# Altium PCB RF_Controller_wv.PcbDoc
Units mil, origin at the board's own origin, x right, y up, seen from the top; angles counter-clockwise.
Board outline 6377.95 x 2913.39 mil, 2 copper layers (Top Layer, Bottom Layer); 84 components, 59 nets, 326 pads, 342 vias.
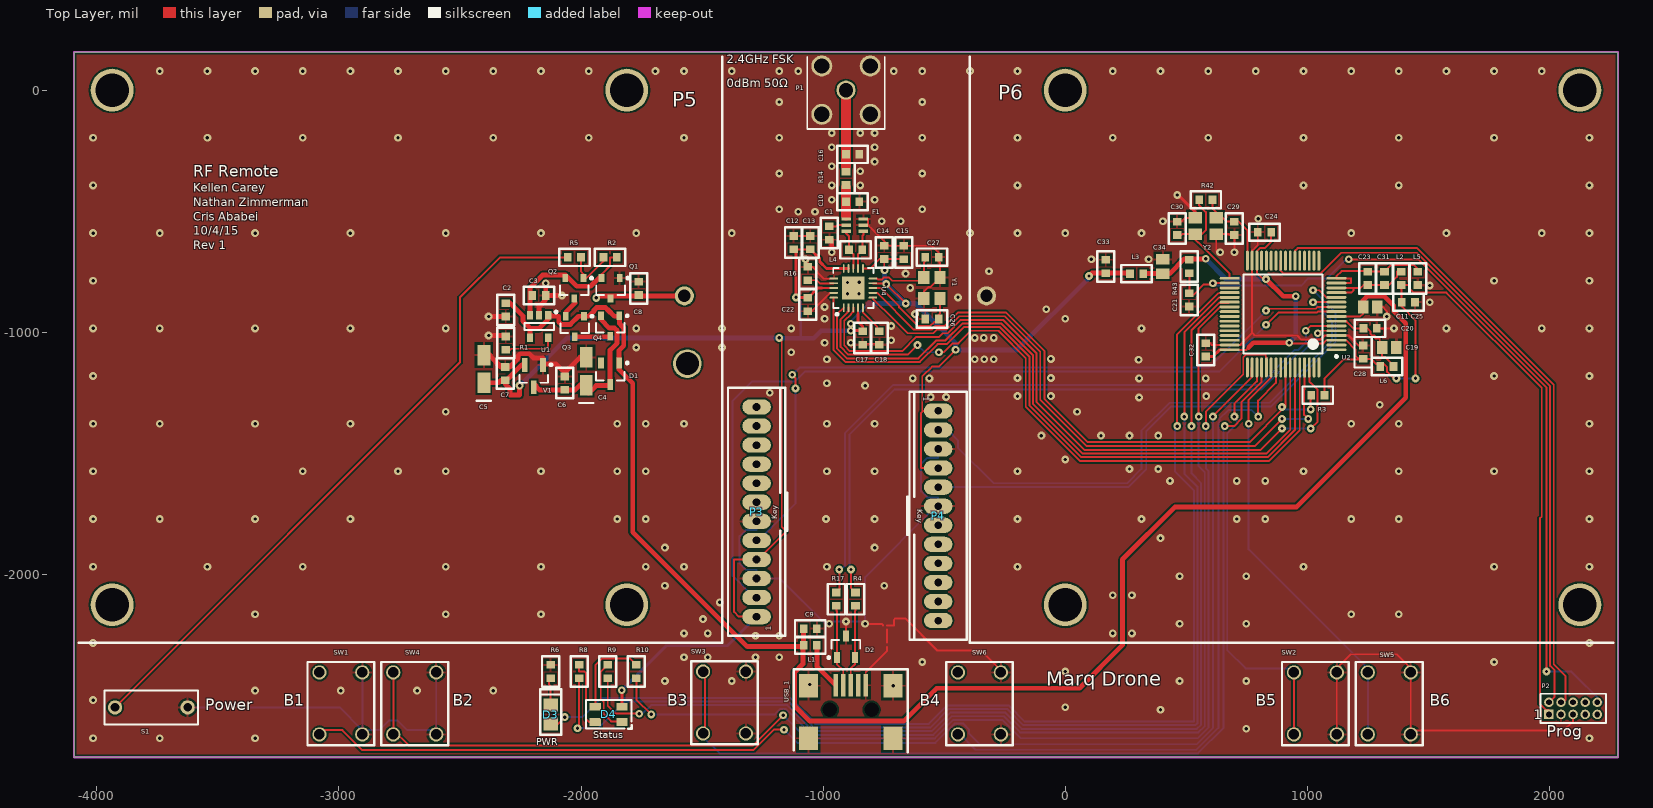
[diagram p0: Top Layer view]
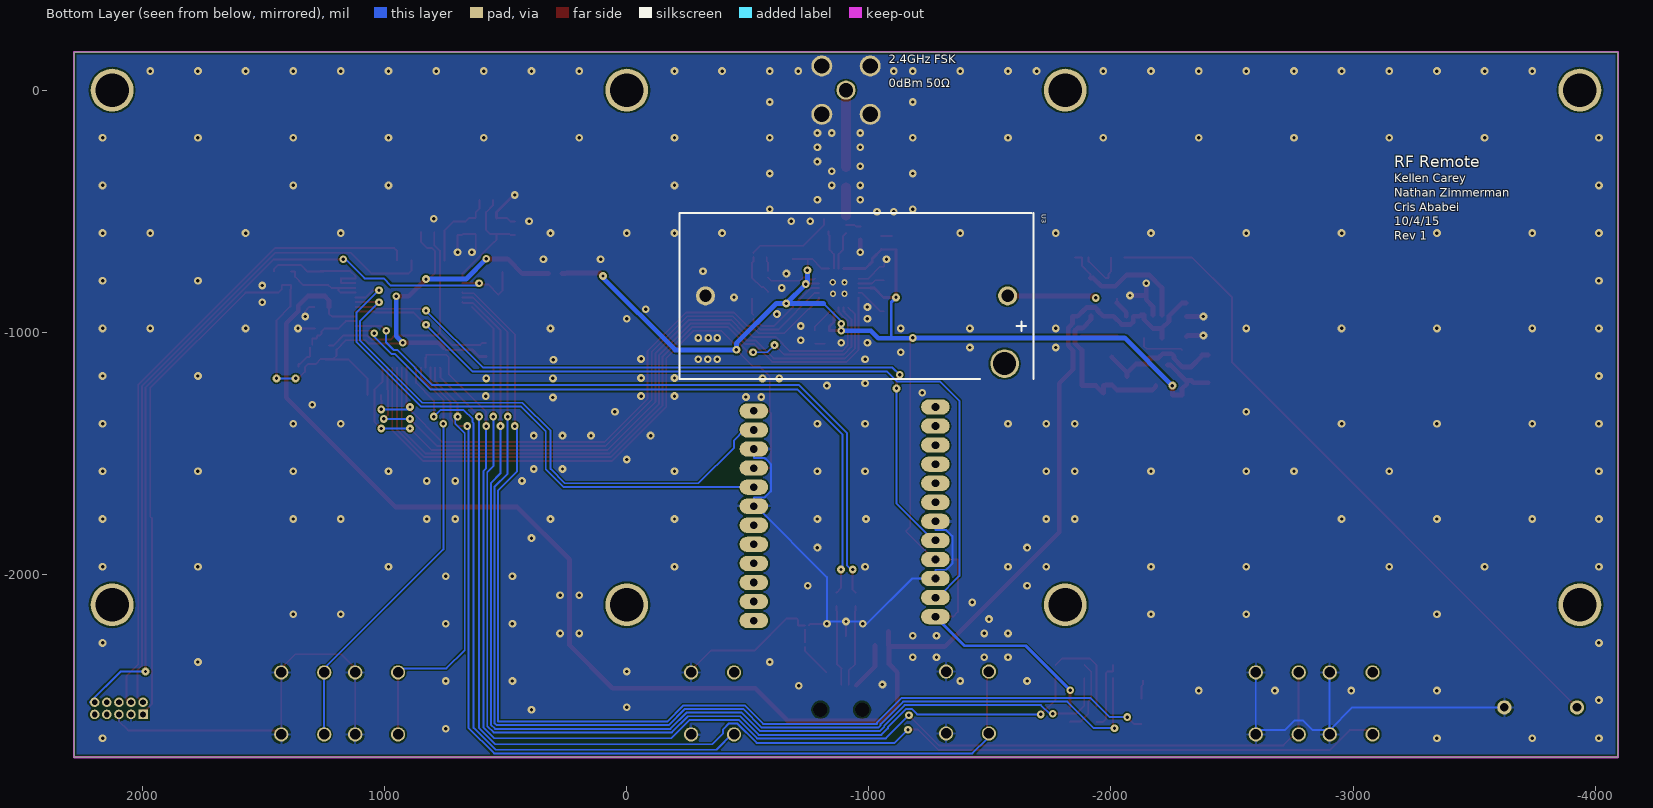
[diagram p1: Bottom Layer view, seen from below]
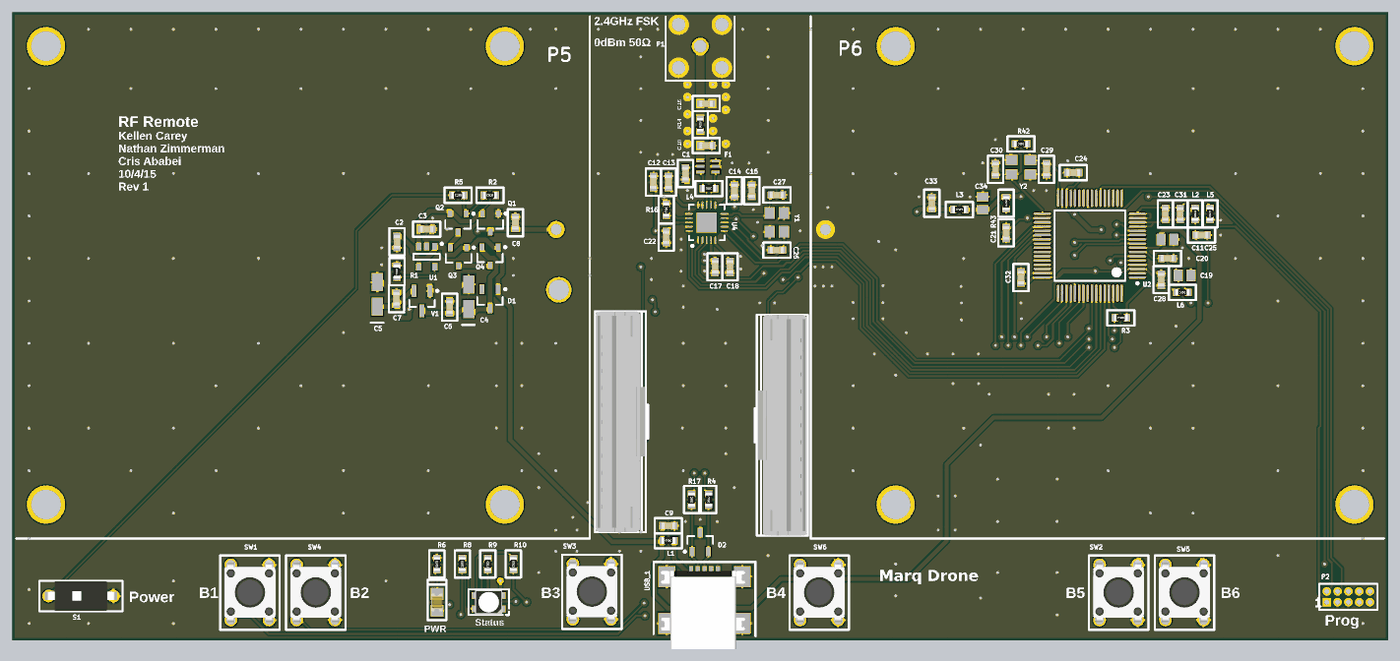
[diagram p2: 3D render of the assembled board from above, using the file's embedded part models]

## Layer stack, top to bottom
Top Solder: solder mask 0.4, Solder Resist, Dk 3.5
Top Layer: signal copper 1.4
Dielectric1: dielectric 12.6, FR-4, Dk 4.8
Bottom Layer: signal copper 1.4
Bottom Solder: solder mask 0.4, Solder Resist, Dk 3.5

## Board outline
-4094.49,-2755.91 2283.46,-2755.91 2283.46,157.48 -4094.49,157.48

## Design rules (kind name [scope] priority, off if disabled: settings)
AssemblyTestPointUsage [All] p1 off:
AssemblyTestpoint [All] p1 off: testpointundercomponent=TRUE minsize=40 maxsize=100 preferedsize=60 minholesize=0 maxholesize=40 preferedholesize=32 testpointgrid=1 usegrid=TRUE gridtolerance=0.01 allowsidetop=TRUE allowsidebottom=TRUE
Clearance [All] p1: gap=7
DiffPairsRouting [All] p1: maxlimit=200 minlimit=10 mostfreqgap=10 toplayer_minwidth=8 toplayer_maxwidth=15 toplayer_prefwidth=15 bottomlayer_minwidth=8 bottomlayer_maxwidth=15 bottomlayer_prefwidth=15 maxuncoupledlength=1000
FabricationTestPointUsage [All] p1 off: valid=0 allowmultiple=FALSE
FabricationTestpoint [All] p1 off: side=3 testpointundercomponent=TRUE minsize=40 maxsize=100 preferedsize=60 minholesize=0 maxholesize=40 preferedholesize=32 testpointgrid=1 allowsidetop=TRUE allowsidebottom=TRUE usegrid=TRUE gridtolerance=0.01
HoleSize [All] p1: absolutevalues=TRUE maxlimit=250 minlimit=1 maxpercent=80.000 minpercent=20.000
HoleToHoleClearance [All] p1: gap=12 allowstackedmicrovias=FALSE
MinimumSolderMaskSliver [All] p1: minsoldermaskwidth=6
PasteMaskExpansion [All] p1: expansion=-2
PlaneConnect PlaneConnect_1 [InComponent('P1') OR InComponent('C16')] p1: planeconnectstyle=Direct reliefexpansion=20 reliefentries=4 reliefconductorwidth=20 reliefairgap=10
PlaneConnect [All] p2: planeconnectstyle=Relief reliefexpansion=20 reliefentries=4 reliefconductorwidth=20 reliefairgap=10
PolygonConnect PolygonConnect_1 [InComponent('P1') OR InComponent('C16') OR InComponent('U3')] p1: connectstyle=Direct reliefconductorwidth=10 reliefentries=4 polygonreliefangle="90 Angle" airgapwidth=10
PolygonConnect PolygonConnect_2 [(InPadClass('All Pads'))] p2: connectstyle=Relief reliefconductorwidth=10 reliefentries=4 polygonreliefangle="90 Angle" airgapwidth=10
PolygonConnect [All] p3: connectstyle=Direct reliefconductorwidth=10 reliefentries=4 polygonreliefangle="90 Angle" airgapwidth=10
RoutingVias [All] p1: holewidth=14 width=32 viastyle="Through Hole" minholewidth=14 minwidth=32 maxholewidth=14 maxwidth=32
SMDEntry [All] p1: side=TRUE corner=FALSE anyangle=TRUE
SilkToSilkClearance [All] p1: silktosilkclearance=4
SilkToSolderMaskClearance SilkscreenOverComponentPads [IsPad] p1: minsilkscreentomaskgap=4 clearancetoexposedcopper=TRUE
SolderMaskExpansion SolderMaskExpansion_1 [InComponent('U2')] p1: expansion=0
SolderMaskExpansion [All] p2: expansion=4
Width Width_3 [InNet('GND')] p1: maxlimit=20 minlimit=6 preferedwidth=12
Width Width_2 [InNet('3.3V')] p2: maxlimit=20 minlimit=6 preferedwidth=12
Width Width_1 [InNet('5V')] p3: maxlimit=20 minlimit=6 preferedwidth=12
Width [All] p4: maxlimit=78.74 minlimit=8 preferedwidth=8
18 further rules are at their usual default settings.

## Classes and differential pairs
differential pair U: +U_P -U_N
differential pair USB_MCU: +USB_MCU_P -USB_MCU_N
differential pair RF: +RF_P -RF_N

## Components (designator, comment, footprint, x,y, rotation, side; value= is the part's Value field where it differs from the comment)
C1 "0805" 1608[0603]C -974.41,-590.55 r270 top
C2 "0805" 1608[0603]C -2311.02,-907.48 r270 top
C3 "0805" 1608[0603]C -2173.23,-848.43 r0 top
C4 "Cap Pol1" 1206_C -1978.35,-1161.42 r90 top
C5 "Cap Pol1" 1206_C -2401.57,-1151.57 r90 top
C6 "0805" 1608[0603]C -2066.93,-1210.63 r90 top
C7 "0805" 1608[0603]C -2312.99,-1171.26 r90 top
C8 "0805" 1608[0603]C -1761.81,-818.9 r90 top
C9 "0805" 1608[0603]C -1053.15,-2224.41 r0 top
C10 "0805" 1608[0603]C -877.95,-460.63 r180 top
C11 "0805" C0805 1259.84,-895.67 r0 top
C12 "0805" 1608[0603]C -1122.05,-629.92 r90 top
C13 "0805" 1608[0603]C -1053.15,-629.92 r90 top
C14 "0805" 1608[0603]C -747.42,-669.96 r90 top
C15 "0805" 1608[0603]C -666.56,-670.47 r90 top
C16 "0805" 1608[0603]C -877.95,-265.75 r180 top
C17 "0805" 1608[0603]C -836.61,-1023.62 r270 top
C18 "0805" 1608[0603]C -767.72,-1023.62 r270 top
C19 "0805" C0805 1338.58,-1062.99 r0 top
C20 "0805" 1608[0603]C 1259.84,-984.25 r0 top
C21 "0805" 1608[0603]C 511.81,-866.14 r90 top
C22 "0805" 1608[0603]C -1062.99,-885.83 r270 top
C23 "0805" 1608[0603]C 1250,-777.56 r270 top
C24 "0805" 1608[0603]C 822.83,-586.61 r0 top
C25 "0805" 1608[0603]C 1417.32,-875.98 r180 top
C26 "0805" 1608[0603]C -550.57,-945.55 r0 top
C27 "0805" 1608[0603]C -550.57,-689.65 r180 top
C28 "0805" 1608[0603]C 1230.32,-1082.68 r270 top
C29 "0805" 1608[0603]C 698.82,-570.87 r90 top
C30 "0805" 1608[0603]C 462.6,-570.87 r270 top
C31 "0805" 1608[0603]C 1318.9,-777.56 r270 top
C32 "0805" 1608[0603]C 580.71,-1072.83 r90 top
C33 "0805" 1608[0603]C 167.32,-728.35 r90 top
C34 "0805" C0805 403.54,-728.35 r90 top
D1 "Bat45C" SOT-23B_N -1879.92,-1171.26 r270 top
D2 "Bat54A" SOT-23B_N -905.71,-2299.8 r90 top
D3 "LG R971-KN-1" 6-0805_M_LED_LIB -2125.28,-2579.33 r90 top
D4 "SMT RGB LED" CLV1A-FKB_RGB_3D -1830.71,-2598.43 r180 top
F1 "BALUN_2_4_GHZ" Balun -904.9,-532.17 r90 top
L1 "FB" 1608[0603]R -1053.15,-2293.31 r0 top
L2 "FB" 1608[0603]R 1387.8,-777.56 r270 top
L3 "10nH" 1608[0603]R 295.28,-757.87 r180 top
L4 "10nH" 1608[0603]R -865.53,-660.12 r0 top
L5 "FB" 1608[0603]R 1456.69,-777.56 r270 top
L6 "10nH" 1608[0603]R 1328.74,-1141.73 r180 top
P1 "SMB" SMA -905.51,0 r0 top
P2 "Header 5X2" MHDR2X5 1998.03,-2578.74 r0 top
P3 "1-1735446-2" 1-1735446-2 -1275,-2175 r90 top
P4 "1-1735446-2" 1-1735446-2 -525,-1325 r270 top
P5 "Header 4" Joystick_Mechanical_Footprint_2 -1811.02,-2125.98 r180 top locked
P6 "Header 4" Joystick_Mechanical_Footprint_2 0,0 r0 top locked
Q1 "k" SOT-23_L -1877.95,-818.9 r270 top
Q2 "k" SOT-23_L -2027.56,-818.9 r270 top
Q3 "k" SOT-23_L -2025.59,-976.38 r270 top
Q4 "k" SOT-23_L -1879.92,-974.41 r270 top
R1 "Res1" 1608[0603]R -2311.02,-1045.28 r90 top
R2 "Res1" 1608[0603]R -1879.92,-690.94 r0 top
R3 "Res1" 1608[0603]R 1043.31,-1259.84 r0 top
R4 "Res1" 1608[0603]R -866.34,-2102.95 r90 top
R5 "Res1" 1608[0603]R -2027.56,-690.94 r0 top
R6 "Res1" 1608[0603]R -2125.98,-2401.57 r90 top
R8 "Res1" 1608[0603]R -2007.87,-2401.57 r90 top
R9 "Res1" 1608[0603]R -1889.76,-2401.57 r90 top
R10 "Res1" 1608[0603]R -1771.65,-2401.57 r90 top
R14 "Res1" 1608[0603]R -905.51,-364.17 r270 top
R16 "Res1" 1608[0603]R -1062.99,-757.87 r90 top
R17 "Res1" 1608[0603]R -945.08,-2102.95 r90 top
R42 "Res1" 1608[0603]R 580.71,-452.76 r180 top
R43 "Res1" 1608[0603]R 511.81,-728.35 r90 top
S1 "SW-SPST" 418117270901_ft_prt_3d -3925,-2550 r0 top
SW1 "1825910-7" Tact_ButtonVV -2992.13,-2529.53 r90 top
SW2 "1825910-7" Tact_ButtonVV 1033.46,-2529.53 r90 top
SW3 "1825910-7" Tact_ButtonVV -1407.48,-2525.68 r90 top
SW4 "1825910-7" Tact_ButtonVV -2687.01,-2529.53 r90 top
SW5 "1825910-7" Tact_ButtonVV 1338.58,-2529.53 r90 top
SW6 "1825910-7" Tact_ButtonVV -354.33,-2529.53 r90 top
U1 "MCP73812" SOT23-5AL -2173.23,-976.38 r270 top
U2 "MKL25Z64VLH4" TSQFP50P1200X1200-64M 900,-925 r180 top
U3 "CR2" BH-CR2-PC_FTPRT -325,-850 r180 bottom locked
U4 "CC2500_2_4_ghz" QFN50P400X400-20VM -875.38,-817.6 r90 top
USB_1 "USB-M2xFxx" USB_Mini_B_SMT -885.83,-2411.42 r0 top
V1 "MCP1702 3.3V Reg" SOT-23B_M -2194.88,-1181.1 r270 top
Y1 "26MHz" 7M-12.000MAAJ-T_FP -550.57,-817.6 r90 top
Y2 "12MHz" 7M-12.000MAAJ-T_FP 580.71,-561.02 r180 top

## Footprints (in the part's own frame and the unit in brackets; to place one, negate y for a bottom-side part, rotate by r counter-clockwise, add the part's x,y. Pads: shape width x height; smd on the part's side, far side on the other; paste and mask are expansions set on the pad)
1-1735446-2 [mm]
  oval 1.6x3 hole 0.8: 1(0,0) 2(2,0) 3(4,0) 4(6,0) 5(8,0) 6(10,0) 7(12,0) 8(14,0) 9(16,0) 10(18,0) 11(20,0) 12(22,0)
  silkscreen extent -2,-3.25 24,3, body extent -2,-2.9 24,2.9, height 6.1
6-0805_M_LED_LIB [mm] "Chip Resistor, Body 2.0x1.2mm, IPC Low Density"
  rect 1.4x1.5 smd: 1(-1,0) 2(1,0)
  silkscreen extent -2.1,-1.1 2.65,1.1, body extent -1.05,-0.67 1.05,0.68, height 0.9
7M-12.000MAAJ-T_FP [mm] "12 MHz Micro Crystal"
  rect 1.4x1.2 smd: 1(-1.1,-0.85) 2(1.1,-0.85) 3(1.1,0.85) 4(-1.1,0.85)
1206_C [mm] "1206_Cap"
  rect 2.15x1.35 smd: 1(-1.45,0) 2(1.45,0)
  silkscreen extent -3.33,-0.71 -3.33,0.76
1608[0603]C [mm] "Chip Capacitor, Body 1.6x0.8mm, IPC High Density"
  rect 0.8x0.9 smd: 1(-0.7,0) 2(0.7,0)
  silkscreen extent -1.6,-0.9 1.6,0.9, body extent -0.8,-0.4 0.8,0.4, height 0.78
1608[0603]R [mm] "Chip Capacitor, Body 1.6x0.8mm, IPC High Density"
  rect 0.8x0.9 smd: 1(-0.7,0) 2(0.7,0)
  silkscreen extent -1.6,-0.9 1.6,0.9, body extent -0.8,-0.4 0.8,0.4, height 0.44
418117270901_ft_prt_3d [mm]
  round 1.5 hole 0.9: 1(0,0) 2(7.62,0)
  silkscreen extent -1.1,-1.8 8.7,1.8, body extent -1.44,-1.74 9.06,1.74, height 3.29
Balun [mm]
  rect 0.35x1 smd mask+0.152: 1(0,0) 2(-0.65,0) 3(-1.3,0) 4(-1.3,-1.8) 5(-0.65,-1.8) 6(0,-1.8)
BH-CR2-PC_FTPRT [mm]
  round 2 hole 1.3: 1(0,0) 2(31.7,0)
  round 3 hole 2.4: ""(31.39,-7.11)
  silkscreen extent -2.72,-8.7 34.42,8.7
C0805 [mm] "Chip Capacitor, Body 2.0x1.3mm, IPC High Density"
  rect 1.1x1.4 smd: 1(-0.75,0) 2(0.75,0)
  body extent -1.1,-0.72 1.1,0.72, height 1.4
CLV1A-FKB_RGB_3D [mm]
  rect 1.2x0.8 smd: 1(0,0.3) 2(0,-1.3) 3(2.8,-1.3) 4(2.8,0.3)
  silkscreen extent -1,-2 3.8,1, body extent -0.35,-1.91 3.15,0.89, height 1.9
Joystick_Mechanical_Footprint_2 [mm] "Layout for mechanically connecting joystick to PCB"
  round 4.5 hole 3.5: 0(0,0) 0(0,-54) 0(54,-54) 1(54,0)
  silkscreen extent -10,-57.5 57.5,4
MHDR2X5 [mm] "Connector; Header; 5x2 Position"
  rect 1x1 hole 0.6 mask+0: 1(0,0)
  round 1 hole 0.6 mask+0: 2(0,1.27) 3(1.27,0) 4(1.27,1.27) 5(2.54,0) 6(2.54,1.27) 7(3.81,0) 8(3.81,1.27) 9(5.08,0) 10(5.08,1.27)
  silkscreen extent -0.9,-0.9 5.98,2.17
QFN50P400X400-20VM [mm] "QFN, 20-Leads, Body 4x4mm, Pitch 0.5mm, IPC Low Density"
  oval 0.9x0.2 smd mask+0.051: 1(-2.05,1) 2(-2.05,0.5) 3(-2.05,0) 4(-2.05,-0.5) 5(-2.05,-1) 11(2.05,-1) 12(2.05,-0.5) 13(2.05,0) 14(2.05,0.5) 15(2.05,1)
  oval 0.2x0.9 smd mask+0.051: 6(-1,-2.05) 7(-0.5,-2.05) 8(0,-2.05) 9(0.5,-2.05) 10(1,-2.05) 16(1,2.05) 17(0.5,2.05) 18(0,2.05) 19(-0.5,2.05) 20(-1,2.05)
  rect 2.4x2.4 smd mask+0.051: 21(0,0)
  silkscreen extent -2.87,-2.1 2.1,2.1, body extent -2.07,-2.07 2.07,2.07, height 1
SMA [mm]
  round 2 hole 1.5: 1(0,0)
  round 2.2 hole 1.6: 2(-2.54,-2.54) 2(-2.54,2.54) 2(2.54,-2.54) 2(2.54,2.54)
  silkscreen extent -4.06,-4.06 4.06,3.5
SOT23-5AL [mm] "SOT23, 5-Leads, Body 2.9x1.6mm, Pitch 0.95mm, Lead Span 2.8mm, IPC High Density"
  rect 0.9x0.65 smd mask+0.051: 1(-1.2,0.95) 2(-1.2,0) 3(-1.2,-0.95) 4(1.2,-0.95) 5(1.2,0.95)
  silkscreen extent -1.65,-1.55 0.35,1.9, body extent -0.9,-1.55 0.9,1.55, height 1.45
SOT-23_L [mm] "SOT23, 3-Leads, Body 2.9x1.3mm, Pitch 0.95mm, Lead Span 2.5mm, IPC High Density"
  rect 0.85x0.6 smd: 1(-1.075,0.95) 2(-1.075,-0.95) 3(1.075,0)
  silkscreen extent -1.2,-1.5 0.7,1.93, body extent -0.7,-1.5 0.7,1.5, height 1.1
SOT-23B_M [mm] "SOT23, 3-Leads, Body 2.9x1.3mm, Pitch 0.95mm, Lead Span 2.4mm, IPC Low Density"
  rect 1.45x0.6 smd: 1(-1.175,0.95) 2(-1.175,-0.95) 3(1.175,0)
  silkscreen extent -1.3,-1.5 0.7,1.93, body extent -0.7,-1.5 0.7,1.5, height 1.14
SOT-23B_N [mm] "SOT23, 3-Leads, Body 2.9x1.3mm, Pitch 0.95mm, Lead Span 2.4mm, IPC Medium Density"
  rect 1.15x0.6 smd: 1(-1.125,0.95) 2(-1.125,-0.95) 3(1.125,0)
  silkscreen extent -1.25,-1.5 0.7,1.93, body extent -0.7,-1.5 0.7,1.5, height 1.14
Tact_ButtonVV [mm]
  round 1.5 hole 1.1: 1(-3.35,-2.25) 2(3.15,-2.25) 3(-3.35,2.25) 4(3.15,2.25)
  silkscreen extent -4.5,-3.5 4.25,3.5, body extent -4.21,-3 4.01,3, height 9.5
TSQFP50P1200X1200-64M [mm] "Thin QFP, 64-Leads, Body 10x10mm, Pitch 0.5mm, IPC Low Density"
  oval 2.1x0.3 smd: 1(-5.6,3.75) 2(-5.6,3.25) 3(-5.6,2.75) 4(-5.6,2.25) 5(-5.6,1.75) 6(-5.6,1.25) 7(-5.6,0.75) 8(-5.6,0.25) 9(-5.6,-0.25) 10(-5.6,-0.75) 11(-5.6,-1.25) 12(-5.6,-1.75) 13(-5.6,-2.25) 14(-5.6,-2.75) 15(-5.6,-3.25) 16(-5.6,-3.75) 33(5.6,-3.75) 34(5.6,-3.25) 35(5.6,-2.75) 36(5.6,-2.25) 37(5.6,-1.75) 38(5.6,-1.25) 39(5.6,-0.75) 40(5.6,-0.25) 41(5.6,0.25) 42(5.6,0.75) 43(5.6,1.25) 44(5.6,1.75) 45(5.6,2.25) 46(5.6,2.75) 47(5.6,3.25) 48(5.6,3.75)
  oval 0.3x2.1 smd: 17(-3.75,-5.6) 18(-3.25,-5.6) 19(-2.75,-5.6) 20(-2.25,-5.6) 21(-1.75,-5.6) 22(-1.25,-5.6) 23(-0.75,-5.6) 24(-0.25,-5.6) 25(0.25,-5.6) 26(0.75,-5.6) 27(1.25,-5.6) 28(1.75,-5.6) 29(2.25,-5.6) 30(2.75,-5.6) 31(3.25,-5.6) 32(3.75,-5.6) 49(3.75,5.6) 50(3.25,5.6) 51(2.75,5.6) 52(2.25,5.6) 53(1.75,5.6) 54(1.25,5.6) 55(0.75,5.6) 56(0.25,5.6) 57(-0.25,5.6) 58(-0.75,5.6) 59(-1.25,5.6) 60(-1.75,5.6) 61(-2.25,5.6) 62(-2.75,5.6) 63(-3.25,5.6) 64(-3.75,5.6)
  silkscreen extent -5.72,-4.15 4.15,4.57, body extent -5,-5 5,5, height 1.6
USB_Mini_B_SMT [mil] "USB Mini B connector SMD"
  rect 20x94 smd mask+0: 1(-62,-47) 2(-31,-47) 3(0,-47) 4(31,-47) 5(62,-47)
  rect 79x98 smd: 6(-175,-49) 7(-175,-266) 8(175,-266) 9(175,-49)
  round 0 hole 60 unplated mask+36: ""(-86,-148) ""(86,-148)
  silkscreen extent -236,-325 236,20, body extent -202,-385 188,-21, height 159

## Part data
C1 C2 C3 C6 C7 C8 C9 C10 C11 C12 C13 C14 C15 C16 C17 C18 C19 C20 C21 C22 C23 C24 C25 C26 C27 C28 C29 C30 C31 C32 C33 C34: library part "Cap Semi", "Capacitor (Semiconductor SIM Model)"
C4 C5: "Polarized Capacitor (Radial)"
D2: library part Bat45C, "Bat45C"
D3: library part LED3
D4: library part RGB_LED_SMT
F1: "2450BM15B0003"
L1 L2 L3 L4 L5 L6: library part Inductor, "Inductor"
P1: "SMB Straight Connector"
P2: "Header, 5-Pin, Dual row"
P3 P4: library part TE_CONN, "TE Connectivity AMP Connector"
P5 P6: "Header, 4-Pin"
Q1 Q2 Q3 Q4: library part PMOS-2, "P-Channel Power MOSFET"
R1 R2 R3 R4 R5 R6 R8 R9 R10 R14 R16 R17 R42 R43: "Resistor"
S1: "Single-Pole, Single-Throw Switch"
SW1 SW2 SW3 SW4 SW5 SW6: library part D6x-XX
U2: "MKL25Z64VLH4 MCU"
USB_1: "USB Mini-B for USB-M2xFxx"
V1: library part MCP1700, "MCP1700 3.3V REG"
Y1 Y2: library part 12MHz_Crystal, "12MHz Micro Crystal"

## Via types
v1: diameter 32, hole 14, Top Layer to Bottom Layer, tented both sides, 323 vias
v2: diameter 32, hole 14, Top Layer to Bottom Layer, 13 vias
v3: diameter 25.98, hole 12.99, Top Layer to Bottom Layer, tented both sides, 3 vias
v4: diameter 32, hole 14, Top Layer to Bottom Layer, tented bottom, 2 vias
v5: diameter 25.98, hole 15, Top Layer to Bottom Layer, tented both sides, 1 vias

## Nets (pads, with @x,y where several pads share a name; then routed paths per layer and width w, separated by ;. In a path a pad name is that pad's centre, name@x,y a point inside that pad or via, vN(x,y) a via of type N, cw(c..) or ccw(c..) an arc to the next point about the centre after c; other vN are vias at no path point)
3.3V: C5.1 C7.1 C12.1 C13.1 C14.1 C15.1 C17.1 C22.1 C33.1 D4.2 L3.2 P3.1 P3.4 P4.1 P4.4 U4.4 U4.9 U4.11 U4.14 U4.15 U4.18 V1.2 | length 7676.7
  Top Layer w6: P3.4 -1267.5,-1938.78 -1151.57,-1822.86 -1171.26,-1803.17 -1171.26,-1033.46 v1(-1181.1,-1023.62)
  Top Layer w8: P3.1 -1348.62,-2175 -1368.11,-2155.51 -1368.11,-1938.98 -1367.91,-1938.78 P3.4 ; C12.1@-1111.6,-658.15 C13.1@-1052.48,-658.15 ; -1004.61,-817.6 U4.18 ; -855.69,-925.2 U4.4@-855.69,-916.02 ; U4.11 -804.51,-736.89 -765.14,-697.52 C14.1 ; U4.9 -742.23,-797.91 v1(-738.86,-801.29) v1(-658.82,-881.33) ; v1(-746.06,-744.09) -747.42,-742.73 C14.1 ; C15.1@-684.27,-698.03 -684.79,-697.52 C14.1 ; P4.4 -594.29,-1561.22 -595.06,-1560.46 -595.06,-1333.24 -590.55,-1328.74 ; P4.1 -586.81,-1325 -590.55,-1328.74 ; v1(-452.75,-1072.83) -521.65,-1141.73 -549.99,-1141.73 -590.55,-1182.29 -590.55,-1328.74
  Top Layer w12: v2(-1831.69,-2479.33) -1831.69,-2481.3 -1830.71,-2482.28 D4.2 ; C12.1@-1111.6,-658.15 -1111.6,-855.69 v1(-1112.2,-856.3) -1061.02,-856.3 -1022.32,-817.6 -1004.61,-817.6 ; C13.1 -1052.48,-658.15 -1013.78,-696.85 -1013.78,-708.66 -985.55,-736.89 U4.15 U4.14 ; v1(-885.83,-994.09) v1(-885.83,-964.56) ; v1@-874.33,-992.44 -836.4,-992.44 -836.4,-976.69 -855.69,-957.4 -855.69,-925.2
  Top Layer w20: C5.1 -2340.55,-1208.66 -2330.71,-1198.82 C7.1 C7.1@-2312.99,-1203.74 ; v1(-2253.94,-1220.47) -2253.94,-1259.84 -2293.31,-1259.84 -2293.31,-1234.25 -2312.99,-1214.57 C7.1@-2312.99,-1203.74 ; V1.2 -2244.09,-1134.84 C7.1@-2312.99,-1203.74 ; v1(98.43,-767.72) 110.24,-755.9 C33.1 250,-755.9 251.97,-757.87 L3.2
  Bottom Layer w8: v1(-885.83,-964.56) -885.83,-954.72 -812.43,-881.33 ; v1(-746.06,-744.09) -746.06,-794.09 v1(-738.86,-801.29)
  Bottom Layer w12: v2(-1831.69,-2479.33) -1647.64,-2295.28 -1395.28,-2295.28 P3.1 ; v1(-1112.2,-856.3) -1092.52,-875.98 -1092.52,-1025.13
  Bottom Layer w20: v1(-2253.94,-1220.47) -2057.09,-1023.62 v1@-1182.66,-1023.62 ; v1@-1181.1,-1025.13 -1092.52,-1025.13 -1039.48,-1025.13 -1008.45,-994.09 v1(-885.83,-994.09) v1(-885.83,-964.56) ; -812.43,-881.33 v1(-658.82,-881.33) ; v1@-746.06,-794.09 v1(-746.06,-744.09) ; v1(-738.86,-801.29) v1(-658.82,-881.33) ; v1(98.43,-767.72) 98.43,-775.02 -199.39,-1072.83 v1(-452.75,-1072.83) -452.75,-1045.85 -617.28,-881.33 v1(-658.82,-881.33)
3.3VB: C19.1 C20.1 L6.1 U2.7 | length 355.2
  Top Layer w8: U2.7 1161.81,-954.53 1161.81,-957.31 1162.91,-957.31 1189.85,-984.25 1202.21,-984.25 C20.1 1248.03,-984.25 1260.65,-996.87 1260.65,-1006.53 1267.1,-1012.97 1276.75,-1012.97 1279.53,-1015.75 1279.53,-1023.62 1281.5,-1025.59 1299.21,-1025.59 C19.1@1299.21,-1053.15 ; C19.1 1309.06,-1100.39 1311.83,-1103.17 1321.49,-1103.17 1350.2,-1131.89 1356.3,-1131.89 L6.1
3.3VC: C24.2 C25.2 C28.2 C32.1 C34.1 L2.2 L3.1 L6.2 P2.1 R3.2 R43.2 U2.3 U2.30 U2.48 | length 4991.3
  Top Layer w8: U2.48 748.23,-1072.64 757.87,-1062.99 ; v1(829.53,-780.71) 818.47,-780.71 791.73,-753.97 U2.30 791.73,-664.72 804.26,-652.19 824.19,-652.19 850.39,-625.98 C24.2 ; v1(925.2,-1043.31) 927.82,-1045.94 1066.47,-1045.94 1079.13,-1033.27 U2.3 1160.28,-1033.27 1198.82,-1071.8 1198.82,-1096.46 1212.6,-1110.24 C28.2 C28.2@1248.03,-1110.24 ; R3.2 1070.87,-1192.91 1151.57,-1112.2 1246.06,-1112.2 C28.2@1248.03,-1110.24 ; v1(1368.11,-1190.94) 1356.49,-1190.94 1329.55,-1164.01 1329.55,-1144.51 1316.93,-1131.89 1285.43,-1131.89 1263.78,-1110.24 C28.2@1248.03,-1110.24 ; v1(1446.85,-1190.94) 1446.85,-950.79 1389.76,-893.7 C25.2 1389.76,-822.83 1387.8,-820.87 L2.2 1425.2,-805.12 1425.2,-822.64 1439.17,-836.61 1574.8,-836.61 1968.5,-1230.31 1968.5,-1761.81 1961.19,-1769.13 1961.19,-2535.29 1985.32,-2559.43 1998.03,-2559.43 P2.1
  Top Layer w12: C32.1 610.43,-1100.39 638.19,-1072.64 U2.48
  Top Layer w20: L3.1 375.98,-757.87 C34.1 431.1,-757.87 491.93,-697.05 v1(580.51,-697.05) ; 757.87,-1062.99 777.56,-1043.31 v1(925.2,-1043.31) ; v1(829.53,-780.71) 900.39,-851.57 v1(952.49,-851.57)
  Bottom Layer w8: v1(1368.11,-1190.94) v1(1446.85,-1190.94)
  Bottom Layer w20: v1(580.51,-697.05) 664.18,-780.71 v1(829.53,-780.71) ; v1(925.2,-1043.31) 952.49,-1016.01 v1(952.49,-851.57)
5V: C2.1 C9.1 C11.1 D1.1 L1.1 Q3.1 Q4.1 U1.1 U1.4 U2.8 | length 6848
  Top Layer w8: U2.8 1218.7,-934.84 1230.32,-923.23 C11.1
  Top Layer w20: C2.1 -2293.31,-879.92 -2240.43,-932.8 -2240.43,-953.89 -2210.63,-983.69 -2210.63,-990.16 ; U1.4 -2210.63,-990.16 ; D1.1@-1842.52,-1104.33 -1842.52,-1154.82 -1786.71,-1210.63 -1786.71,-1825.5 -1313.38,-2298.82 -1083.17,-2298.82 -1083.17,-2370.22 -1117.33,-2404.38 -1117.33,-2544.09 -1055,-2606.42 -667.44,-2606.42 -531.5,-2470.47 59.06,-2470.47 236.22,-2293.31 236.22,-1938.98 452.76,-1722.44 954.72,-1722.44 1406.76,-1270.4 1406.76,-963.85 1357.01,-914.1 1357.01,-890.06 1318.07,-851.11 1247.32,-851.11 1230.32,-868.11 C11.1 ; -1842.52,-1097.44 -1842.52,-1074.8 -1823.39,-1055.68 -1823.39,-982.49 -1831.09,-974.79 ; -1830.71,-974.41 -1831.09,-974.79 ; L1.1 -1080.71,-2242.13 C9.1@-1080.71,-2236.22 ; -2210.63,-990.16 -2204.72,-984.25 -2173.23,-984.25 -2135.83,-946.85 U1.1 -2123.03,-929.13 -2118.11,-934.06 -2091.8,-934.06 -2091.8,-957.83 -2081.84,-967.79 -2044.14,-967.79 -2010.41,-934.06 Q3.1 -1967.94,-934.06 -1946.13,-912.25 -1946.13,-908.31 -1936.18,-898.35 -1898.47,-898.35 -1888.51,-908.31 -1862.77,-934.06 -1840.55,-934.06 -1840.55,-965.33 -1831.09,-974.79
BUTTON_1: SW1.3 U2.50 | length 5456.3
  Top Layer w8: SW1.3@-3080.51,-2643.7 -2986.22,-2643.7 -2903.54,-2726.38 -1287.84,-2726.38 -1203.2,-2641.73 v1(-1161.42,-2641.73) ; v1(610.24,-1348.43) 610.24,-1346.94 769.27,-1187.91 769.27,-1148.25 U2.50
  Bottom Layer w8: v1(-1161.42,-2641.73) -1106.3,-2696.85 -535.86,-2696.85 -455.37,-2616.36 -421.8,-2616.36 -398.05,-2640.1 -398.05,-2657.48 -353.59,-2701.94 543.89,-2701.94 610.24,-2635.59 v1(610.24,-1348.43) v1@610.24,-1338.58
BUTTON_2: SW2.3 SW2.4 U2.51 | length 1788.9
  Top Layer w8: v1(698.82,-1348.43) 698.82,-1296.35 791.73,-1203.44 U2.51 ; SW2.3@944.49,-2644.81 SW2.4@944.49,-2388.9
  Bottom Layer w8: v1(698.82,-1348.43) 708.66,-1358.27 708.66,-1377.95 669.29,-1417.32 669.29,-2312.99 745.2,-2388.9 SW2.4@944.49,-2388.9
BUTTON_3: SW3.3 SW3.4 U2.52 | length 4102
  Top Layer w8: SW3.3@-1488.58,-2631.89 SW3.4@-1488.58,-2375.98 ; v1(659.45,-1387.8) 697.63,-1387.8 729.12,-1356.3 729.12,-1287.26 811.42,-1204.97 U2.52
  Bottom Layer w8: SW3.3@-1488.58,-2631.89 -1488.58,-2679.3 -1427.98,-2739.91 548.35,-2739.91 654.29,-2633.96 654.29,-1392.95 v1(659.45,-1387.8) ; v1@664.24,-1387.8 v1@664.24,-1376.88
BUTTON_4: SW4.3 SW4.4 U2.53 | length 5581.7
  Top Layer w8: SW4.4@-2775.39,-2387.79 -2775.39,-2643.7 -2712.4,-2706.69 -1289.37,-2706.69 v1(-1165.35,-2582.68) ; v1(580.71,-1387.8) 580.71,-1328.74 735.46,-1173.99 735.46,-1103.04 745.36,-1093.13 828.2,-1093.13 828.32,-1093.25 828.32,-1104.13 831.1,-1104.13 U2.53
  Bottom Layer w8: v1(-1165.35,-2582.68) -1069.92,-2678.11 -538.33,-2678.11 -461.58,-2601.36 -259.63,-2601.36 -183.83,-2677.17 547.45,-2677.17 591.5,-2633.12 591.5,-1572.69 580.71,-1561.9 v1@580.71,-1377.96
BUTTON_5: SW5.3 SW5.4 U2.54 | length 1741.7
  Top Layer w8: v1(757.87,-1377.95) 757.87,-1279.72 850.79,-1186.81 U2.54
  Bottom Layer w8: v1(757.87,-1377.95) 757.87,-1896.69 1250.08,-2388.9 SW5.3@1250.08,-2644.81
BUTTON_6: SW6.3 U2.55 | length 2834.7
  Top Layer w8: v1(797.24,-1348.43) 797.24,-1282.87 870.47,-1209.64 U2.55
  Bottom Layer w8: SW6.3@-438.58,-2656.89 -370.57,-2724.91 542.14,-2724.91 632.45,-2634.59 632.45,-1376.61 637.24,-1371.82 637.24,-1358.27 674.08,-1321.43 770.24,-1321.43 v1(797.24,-1348.43)
CMP_OUT: U2.1
CSN: R3.1 U2.57 U4.7 | length 2530
  Top Layer w8: U4.7 -776.95,-837.28 -624.97,-989.27 -551.61,-989.27 -536.61,-974.27 -498.44,-974.27 -443.27,-919.09 -244.52,-919.09 -86.06,-1077.56 -86.06,-1274.96 93.15,-1454.17 761.59,-1454.17 898.82,-1316.93 v1@903.54,-1316.93 ; v1@909.84,-1309.06 U2.57 ; v1(1013.78,-1318.9) 1013.78,-1279.53 1015.75,-1277.56 R3.1
  Bottom Layer w8: v1(895.67,-1309.06) 905.51,-1318.9 v1(1013.78,-1318.9)
EXTAL+: C29.2 R42.1 U2.32 Y2.1 | length 356.4
  Top Layer w8: R42.1 608.27,-488.19 624.02,-503.94 Y2.1 651.57,-527.56 667.32,-543.31 C29.2 716.54,-543.31 752.36,-579.13 U2.32
EXTAL-: C30.2 R42.2 U2.33 Y2.3 | length 506.8
  Top Layer w8: C30.2 480.31,-598.43 484.25,-594.49 Y2.3 ; R42.2 553.15,-476.57 580.71,-504.13 580.71,-578.74 564.96,-594.49 Y2.3 ; U2.33 679.53,-757.88 551.38,-629.73 549.02,-629.73 537.4,-618.11 Y2.3
EXTRA_LED: R9.1 U2.38 | length 4571.1
  Top Layer w8: R9.1 -1889.76,-2543.12 -1857.09,-2575.79 v1(-1759.84,-2575.79) ; v1(521.65,-1387.8) 521.65,-992.32 635.41,-878.57 676.75,-878.57 U2.38
  Bottom Layer w8: v1(-1759.84,-2575.79) -1751.37,-2575.79 -1748.42,-2578.74 -1710.36,-2540.68 -1147.96,-2540.68 -1063.46,-2625.17 -1063.46,-2630.54 -1045.89,-2648.11 -550.76,-2648.11 -474.01,-2571.36 -246.66,-2571.36 -179.75,-2638.27 543.92,-2638.27 561.5,-2620.69 561.5,-1622.96 521.65,-1583.12 v1@521.65,-1377.95
GDO0: U2.61 U4.6 | length 2494.8
  Top Layer w8: U4.6 -794.67,-860.91 -708.16,-947.41 -707.32,-947.41 -650.46,-1004.27 -545.4,-1004.27 -530.4,-989.27 -492.23,-989.27 -437.05,-934.09 -250.74,-934.09 -103.11,-1081.72 -103.11,-1279.12 86.93,-1469.17 784.77,-1469.17 v1(895.67,-1358.27) ; U2.61 988.58,-1235.83 986.78,-1237.63 986.78,-1341.11 v1(1003.94,-1358.27)
  Bottom Layer w8: v1(895.67,-1358.27) v1(1003.94,-1358.27)
GDO2: U2.62 U4.3 | length 2818.6
  Top Layer w8: U4.3 -875.38,-916.02 -876.65,-916.02 -884.81,-924.18 -884.81,-925.37 -912.83,-953.38 -912.83,-1054.49 -889.39,-1077.93 -673.2,-1077.93 -614.54,-1019.27 -520.7,-1019.27 -505.7,-1004.27 -486.01,-1004.27 -430.84,-949.09 -256.95,-949.09 -118.11,-1087.94 -118.11,-1289.37 78.74,-1486.22 807.09,-1486.22 v1(895.67,-1397.64) ; U2.62 1008.27,-1205.12 1013.78,-1210.63 1015.56,-1210.63 1042.5,-1237.57 1042.5,-1368.92 v1(1013.78,-1397.64)
  Bottom Layer w8: v1(895.67,-1397.64) v1(1013.78,-1397.64)
GND: C1.2 C2.2 C3.2 C4.2 C5.2 C6.2 C7.2 C8.2 C9.2 C10.1 C11.2 C12.2 C13.2 C14.2 C15.2 C16.1 C17.2 C18.2 C19.2 C20.2 C21.1 C22.2 C24.1 C25.1 C26.1 C27.1 C28.1 C29.1 C30.1 C32.2 C33.2 C34.2 D2.3 F1.5 F1.6 L5.2 P1.2 P2.3 P2.5 P3.3 P3.6 P4.3 P4.6 Q1.1 R1.2 R6.2 R16.2 S1.2 SW1.1 SW1.2 SW2.1 SW2.2 SW3.1 SW3.2 SW4.1 SW4.2 SW5.1 SW5.2 SW6.1 SW6.2 U1.2 U2.4 U2.31 U2.47 U3.1 U4.16 U4.19 U4.21 USB_1.5 USB_1.6 USB_1.7 USB_1.8 USB_1.9 V1.1 Y1.2 Y1.4 Y2.2 Y2.4 | length 9707.1
  Top Layer w6: v1(-1072.83,-698.82) -1072.83,-704.73 -1062.99,-714.57 R16.2 -1045.28,-730.31 -997.36,-778.23 U4.16 ; C22.2 -1045.99,-913.39 -969.89,-837.28 U4.19
  Top Layer w8: -1095.85,-603.03 C13.2@-1050.57,-603.03 ; USB_1.6 v4(-1055.83,-2455.42) ; D2.3 -905.51,-2255.31 v1(-905.51,-2194.88) ; v1(-826.77,-2204.72) -758.66,-2204.72 -752.17,-2211.22 ; -824.02,-2405.13 -736.42,-2317.52 -736.42,-2299.8 ; -818.68,-1047.56 C18.2@-776.4,-1047.56 ; F1.6@-814.35,-532.17 -814.35,-557.76 -729.2,-642.91 C15.2 -552.03,-642.91 C27.1@-523.02,-671.93 ; P1.2@-805.51,-139.46 P1.2@-805.51,-100 ; -736.42,-2282.09 -736.42,-2226.97 ; -736.42,-2211.22 -708.05,-2211.22 -708.05,-2188.95 -701.6,-2182.5 -660.02,-2182.5 -527.56,-2314.96 -347.44,-2314.96 SW6.2@-254.59,-2407.81 ; Y1.4@-584.04,-833.35 -563.54,-812.85 -555.86,-812.85 -517.11,-774.1 -517.11,-713.27 -523.02,-707.36 C27.1 ; SW6.1@-261.42,-2656.89 SW6.1@-254.59,-2650.06 ; C30.1 480.31,-543.31 496.06,-527.56 Y2.2 ; v1@462.6,-442.91 v1(462.6,-433.07) ; C32.2 598.43,-1045.27 606.1,-1052.95 U2.47 720.87,-1052.95 772.05,-1001.77 ; v1(639.76,-669.29) 639.76,-679.13 624.02,-663.39 Y2.4 677.17,-594.49 681.1,-598.42 C29.1 v1(698.82,-669.29) ; C24.1 795.28,-639.96 772.05,-663.19 U2.31 772.05,-1001.77 ; SW2.1@1121.66,-2644.81 1121.66,-2388.9 1180.24,-2330.31 1368.66,-2330.31 1427.25,-2388.9 1427.25,-2644.81 2059.92,-2644.81 2098.03,-2606.69 P2.5 ; C28.1 1212.6,-1055.12 1171.06,-1013.58 U2.4 1071.84,-1013.58 1054.49,-1030.94 975.71,-1030.94 958.36,-1013.58 783.86,-1013.58 772.05,-1001.77 ; C20.2 1303.15,-984.25 v1(1358.27,-984.25) ; C11.2 1311.02,-895.67 1328.74,-913.38 v1(1328.74,-935.04)
  Top Layer w12: v1@462.6,-442.91 476.38,-442.91 537.4,-503.94 Y2.2
  Top Layer w20: C5.2 -2375,-1094.49 -2375,-1099.41 -2330.71,-1143.7 C7.2 -2295.28,-1143.7 -2261.09,-1109.52 -2261.09,-1099.26 -2251.14,-1089.3 -2213.43,-1089.3 -2196.43,-1106.3 -2157.48,-1106.3 -2157.48,-1129.92 -2155.51,-1131.89 -2102.36,-1131.89 C6.2@-2066.93,-1167.32 ; v1(-2381.89,-1013.78) -2314.96,-1013.78 R1.2 ; v1(-2381.89,-935.04) C2.2 ; U1.2 -2173.23,-893.7 -2145.67,-866.14 C3.2 ; v1(-2145.67,-797.24) C3.2 ; v1(-2078.74,-848.43) C3.2 ; C6.2 C6.2@-2066.93,-1167.32 ; C6.2@-2066.93,-1181.1 C6.2@-2066.93,-1167.32 ; C4.2@-2002.95,-1102.36 -2004.92,-1104.33 -2004.92,-1105.31 C6.2@-2066.93,-1167.32 ; v1(-964.57,-669.29) C1.2@-964.57,-618.11
  Bottom Layer w8: S1.2 -2997.05,-2550 SW1.1@-2903.35,-2643.7 ; SW1.2@-2903.35,-2387.79 SW1.1@-2903.35,-2643.7 ; SW4.2@-2598.23,-2387.79 -2598.23,-2643.7 -2718.08,-2643.7 -2758.61,-2603.17 -2792.18,-2603.17 -2832.71,-2643.7 SW1.1@-2903.35,-2643.7 ; P3.6 -1275,-1817.54 -1320.16,-1817.54 -1345.06,-1842.44 -1345.06,-1956.38 -1320.16,-1981.28 -1275,-1981.28 P3.3 -1178.15,-2017.52 -990.94,-2204.72 v1(-974.41,-2204.72) -964.57,-2194.88 v1(-905.51,-2194.88) -836.61,-2194.88 v1(-826.77,-2204.72) -826.77,-2011.56 P4.6@-533.92,-1718.7 ; v1(-1072.83,-698.82) v1@-1062.99,-688.98 ; v4(-1055.83,-2455.42) -1055.83,-2457.95 v4@-1053.15,-2460.63 ; P4.6 -525,-1682.46 -570.16,-1682.46 -595.06,-1657.56 -595.06,-1543.62 -570.16,-1518.72 -525,-1518.72 P4.3 ; U3.1@-360.04,-854.33 U3.1@-340.35,-834.65 ; v1(1328.74,-935.04) v1@1338.58,-925.2 ; SW5.2@1427.16,-2388.82 SW5.2@1427.25,-2388.9
  other v1: -4015.75,-2677.17 -3740.16,-2677.17 -3346.46,-2677.17 2165.35,-2677.17 748.03,-2637.8 393.7,-2559.06 0,-2549.21 -4015.75,-2519.69 -3346.46,-2480.31 -2992.13,-2480.31 -2677.17,-2480.31 -2362.2,-2480.31 -1653.54,-2440.94 -1377.95,-2440.94 472.44,-2440.94 748.03,-2440.94 0,-2401.57 -590.55,-2362.2 1771.65,-2362.2 -1574.8,-2342.52 -1476.38,-2342.52 -1279.53,-2342.52 -1181.1,-2342.52 -4015.75,-2283.46 2165.35,-2283.46 -1279.53,-2253.94 -1181.1,-2253.94 -1574.8,-2244.09 -1476.38,-2244.09 196.85,-2244.09 275.59,-2244.09 472.44,-2204.72 748.03,-2204.72 -1496.06,-2185.04 -3346.46,-2165.35 -2559.06,-2165.35 -2165.35,-2165.35 1181.1,-2165.35 1377.95,-2165.35 -1427.17,-2116.14 196.85,-2086.61 275.59,-2086.61 -1653.54,-2047.24 -748.03,-2047.24 472.44,-2007.87 748.03,-2007.87 -4015.75,-1968.5 -3543.31,-1968.5 -3149.61,-1968.5 -2559.06,-1968.5 -2165.35,-1968.5 -1732.28,-1968.5 -1574.8,-1968.5 -984.25,-1968.5 -196.85,-1968.5 984.25,-1968.5 1771.65,-1968.5 2165.35,-1968.5 -1653.54,-1889.76 -787.4,-1889.76 393.7,-1850.39 -4015.75,-1771.65 -3740.16,-1771.65 -3346.46,-1771.65 -2952.76,-1771.65 -1850.39,-1771.65 -1732.28,-1771.65 -988.19,-1771.65 -787.4,-1771.65 -196.85,-1771.65 314.96,-1771.65 708.66,-1771.65 826.77,-1771.65 1181.1,-1771.65 1377.95,-1771.65 2165.35,-1771.65 433.07,-1614.17 708.66,-1614.17 826.77,-1614.17 -4015.75,-1574.8 -3149.61,-1574.8 -2755.91,-1574.8 -2559.06,-1574.8 -2165.35,-1574.8 -1850.39,-1574.8 -1732.28,-1574.8 -984.25,-1574.8 -787.4,-1574.8 -196.85,-1574.8 984.25,-1574.8 1377.95,-1574.8 1771.65,-1574.8 2165.35,-1574.8 265.75,-1564.96 383.86,-1564.96 0,-1525.59 -98.43,-1427.17 147.64,-1427.17 265.75,-1427.17 383.86,-1427.17 -4015.75,-1377.95 -3740.16,-1377.95 -3346.46,-1377.95 -2952.76,-1377.95 -1850.39,-1377.95 -1732.28,-1377.95 -1574.8,-1377.95 -984.25,-1377.95 -787.4,-1377.95 1181.1,-1377.95 1377.95,-1377.95 2165.35,-1377.95 -2559.06,-1328.74 49.21,-1328.74 1299.21,-1299.21 305.12,-1269.69 -555.12,-1267.72 -492.13,-1267.72 -196.85,-1263.78 -59.06,-1263.78 582.68,-1263.78 -1220.47,-1250 -826.77,-1220.47 -984.25,-1210.63 -629.92,-1190.94 -561.02,-1190.94 305.12,-1190.95 580.71,-1190.94 -196.85,-1188.98 -59.06,-1188.98 -4015.75,-1181.1 1771.65,-1181.1 2165.35,-1181.1 303.15,-1114.17 -984.25,-1112.2 -374.02,-1112.2 -334.65,-1112.2 -295.28,-1112.2 -59.06,-1110.24 -1131.89,-1082.68 -1771.65,-1062.99 -1417.32,-1062.99 -994.09,-1043.31 -885.83,-1043.31 -718.5,-1033.46 -374.02,-1023.62 -336.52,-1023.62 -295.28,-1023.62 -4015.75,-984.25 -3740.16,-984.25 -3346.46,-984.25 -2952.76,-984.25 -2559.06,-984.25 -1771.65,-984.25 -1417.32,-984.25 -1131.89,-984.25 314.96,-984.25 1574.8,-984.25 1968.5,-984.25 2165.35,-984.25 -718.5,-974.41 -994.09,-944.88 0,-944.88 -620.08,-925.2 -78.74,-905.51 -994.09,-895.67 1505.91,-875.98 -442.91,-856.3 -639.76,-816.93 1505.91,-807.09 -4015.75,-787.4 1771.65,-787.4 2165.35,-787.4 -659.45,-757.87 -314.96,-748.03 108.27,-698.82 344.49,-698.82 -4015.75,-590.55 -3740.16,-590.55 -3346.46,-590.55 -2952.76,-590.55 -2559.06,-590.55 -2165.35,-590.55 -1771.65,-590.55 -1377.95,-590.55 -393.7,-590.55 -196.85,-590.55 0,-590.55 314.96,-590.55 1181.1,-590.55 1574.8,-590.55 1968.5,-590.55 2165.35,-590.55 -757.87,-541.34 -679.13,-541.34 403.54,-541.34 797.24,-531.5 -1102.36,-501.97 -1033.46,-501.97 -1181.1,-492.13 -590.55,-492.13 -4015.75,-393.7 -196.85,-393.7 984.25,-393.7 1377.95,-393.7 2165.35,-393.7 -1181.1,-344.49 -590.55,-344.49 -4015.75,-196.85 -3543.31,-196.85 -3149.61,-196.85 -2755.91,-196.85 -2362.2,-196.85 -1968.5,-196.85 -1574.8,-196.85 -1181.1,-196.85 -590.55,-196.85 -196.85,-196.85 196.85,-196.85 590.55,-196.85 984.25,-196.85 1377.95,-196.85 1771.65,-196.85 2165.35,-196.85 -1181.1,-49.21 -590.55,-49.21 -3740.16,78.74 -3543.31,78.74 -3346.46,78.74 -3149.61,78.74 -2952.76,78.74 -2755.91,78.74 -2559.06,78.74 -2362.2,78.74 -2165.35,78.74 -1968.5,78.74 -1692.91,78.74 -1574.8,78.74 -1377.95,78.74 -1181.1,78.74 -1102.36,78.74 -708.66,78.74 -590.55,78.74 -393.7,78.74 -196.85,78.74 196.85,78.74 393.7,78.74 590.55,78.74 787.4,78.74 984.25,78.74 1181.1,78.74 1377.95,78.74 1574.8,78.74 1771.65,78.74 1968.5,78.74
  other v2: -964.57,-452.76 -787.4,-452.76 -964.57,-393.7 -846.46,-393.7 -846.46,-334.65 -964.57,-314.96 -787.4,-295.28 -964.57,-236.22 -787.4,-236.22 -964.57,-177.17 -846.46,-177.17 -787.4,-177.17
  other v3: -899,-841.22 -851.75,-841.22 -899,-793.98
  other v4: -710.83,-2460.42
  other v5: -851,-793.98
KL25_SWD_CLK: P2.4 U2.22 | length 2694.9
  Top Layer w8: U2.22 949.21,-663.19 960.21,-652.19 1454.02,-652.19 2018.19,-1216.36 2018.19,-2372.18 2067.35,-2421.34 2067.35,-2519.01 2057.61,-2528.74 P2.4
MISO: U2.60 U4.2 | length 2805.7
  Top Layer w8: U4.2 -895.06,-913.22 -896.53,-914.69 -899.81,-914.69 -899.81,-919.15 -927.83,-947.17 -927.83,-1060.7 -895.6,-1092.93 -650.02,-1092.93 v1(-610.24,-1053.15) ; v1(-521.65,-1082.68) -500.78,-1082.68 -463.94,-1045.83 -441.57,-1045.83 -389.83,-994.09 -275.59,-994.09 -163.11,-1106.57 -163.11,-1308.01 60.1,-1531.22 842.7,-1531.22 968.9,-1405.02 U2.60
  Bottom Layer w8: v1(-610.24,-1053.15) -580.71,-1082.68 v1(-521.65,-1082.68)
MOSI: U2.59 U4.20 | length 2849.3
  Top Layer w8: U4.20 -957.83,-858.71 -957.83,-1073.13 -908.03,-1122.93 -600.42,-1122.93 -526.76,-1049.27 -488.59,-1049.27 -418.41,-979.09 -269.38,-979.09 -148.11,-1100.36 -148.11,-1301.8 66.31,-1516.22 836.48,-1516.22 949.21,-1403.49 U2.59
NetC1_1: C1.1 F1.2 | length 61.8
  Top Layer w8: C1.1@-964.57,-562.99 -946.85,-562.99 -941.61,-557.76 F1.2
NetC3_1: C3.1 Q1.2 Q2.2 R2.2 U1.3 | length 591
  Top Layer w8: Q1.2 -1915.35,-759.84 -1879.92,-724.41 -1879.92,-690.94 R2.2
  Top Layer w20: U1.3 -2210.63,-815.54 -2159.34,-764.24 -2063.51,-764.24 -2017.45,-810.31 -1960.9,-810.31 -1927.17,-776.57 Q1.2
NetC8_1: C8.1 Q1.3 U3.2 | length 367.4
  Top Layer w20: v1(-1937.01,-858.25) -1928.76,-850 U3.2
NetC10_2: C10.2 F1.1 R14.2 | length 118.1
  Top Layer w39.37: -905.51,-519.68 R14.2@-905.51,-401.57
NetC18_1: C18.1 U4.5 | length 101.1
  Top Layer w8: U4.5@-836.01,-916.02 -836.01,-917.09 -776.4,-976.69 C18.1@-776.4,-992.44
NetC23_1: C23.1 C31.1 L5.1 U2.15 U2.16 | length 541.8
  Top Layer w8: U2.15 1161.81,-797.05 1162.01,-797.24 1181.1,-797.24 1181.1,-777.56 1180.91,-777.36 U2.16 1120.47,-769.29 1141.73,-748.03 1265.75,-748.03 C23.1@1267.72,-750 ; C23.1 C23.1@1267.72,-750 ; L5.1 1456.69,-738.25 1441.69,-723.25 1345.65,-723.25 C31.1 C23.1@1267.72,-750
NetC23_2: C23.2 C31.2 L2.1 U2.13 U2.14 | length 392.2
  Top Layer w8: U2.13 1181.3,-836.42 1190.94,-826.77 1190.94,-816.73 ; U2.14 1190.94,-816.73 ; L2.1 1370.08,-750 1370.08,-771.65 1336.61,-805.12 C31.2 C23.2 1232.28,-805.12 1220.67,-816.73 1190.94,-816.73
NetC26_2: C26.2 U4.8 Y1.1 | length 428.1
  Top Layer w8: U4.8 -760.73,-817.6 -685.82,-892.51 -685.82,-897.64 -609.19,-974.27 -557.83,-974.27 -541.5,-957.94 -523.01,-957.94 C26.2 ; C26.2@-523.01,-927.84 -517.11,-921.93 Y1.1
NetC27_2: C27.2 U4.10 Y1.3 | length 268.8
  Top Layer w8: U4.10@-776.95,-778.23 -772.27,-782.91 -758.66,-782.91 -750.04,-774.29 -727.67,-774.29 -714.56,-787.4 -597.15,-787.4 Y1.3 ; Y1.3@-584.04,-746.73 -584.04,-713.27 -578.13,-707.36 C27.2
NetD3_2: D3.2 R6.1 | length 77.4
  Top Layer w8: R6.1@-2132.87,-2438.19 -2132.87,-2453.94 -2125.28,-2461.54 D3.2@-2125.28,-2512.4
NetD4_1: D4.1 R9.2 | length 309.3
  Top Layer w8: R9.2 -1918.48,-2402.73 -1918.48,-2514.78 -1906.32,-2526.94 -1906.32,-2576.94 -1875.98,-2607.28 -1833.66,-2607.28 D4.1
NetD4_3: D4.3 R10.2 | length 363.4
  Top Layer w8: D4.3 -1940.94,-2376.18 -1912.04,-2347.27 -1798.4,-2347.27 R10.2
NetD4_4: D4.4 R8.2 | length 292.9
  Top Layer w8: R8.2 -2007.87,-2402.39 -1985.6,-2402.39 -1979.16,-2408.83 -1979.16,-2449.44 -1980.32,-2450.6 -1980.32,-2596.46 -1966.54,-2610.24 D4.4
NetL1_2: L1.2 USB_1.1 | length 197.3
  Top Layer w20: L1.2 -1025.59,-2380.65 USB_1.1
NetQ2_1: Q2.1 R2.1 R5.2 | length 218.2
  Top Layer w8: R5.2 -2000,-750 -1990.16,-759.84 Q2.1 -1978.35,-776.57 -1910.43,-708.66 -1907.48,-708.66 R2.1
NetQ2_3: Q2.3 Q3.2 | length 88.3
  Top Layer w8: -2025.59,-877.95 Q2.3@-2025.59,-861.22
  Top Layer w20: Q3.2 -2062.99,-917.32 -2025.59,-879.92 -2025.59,-877.95
NetQ3_3: Q3.3 Q4.3 | length 147.6
  Top Layer w20: Q3.3 Q4.3@-1877.95,-1018.7
NetR1_1: R1.1 U1.5 | length 197.5
  Top Layer w8: R1.1@-2293.31,-1072.83 -2288.77,-1068.3 -2147.04,-1068.3 -2135.83,-1057.09 U1.5
NetR5_1: R5.1 S1.1 | length 2797.3
  Top Layer w8: S1.1 -2500,-1125 -2500,-856.3 -2334.65,-690.94 R5.1
NetR16_1: R16.1 U4.17 | length 112.1
  Top Layer w8: R16.1 -1025.59,-785.43 -1013.11,-797.91 U4.17
POT_0: P3.2 U2.9 | length 3506.1
  Top Layer w8: v1(829.53,-969.69) 881.23,-917.98 1041.02,-917.98 1043.85,-915.16 U2.9
  Bottom Layer w8: P3.2 -1283.92,-2096.26 -1374.02,-2006.16 -1374.02,-1283.46 -1293.77,-1203.22 -1138.49,-1203.22 -1116.12,-1203.22 -1074.42,-1161.52 637.7,-1161.52 v1(829.53,-969.69)
POT_1: P3.5 U2.10 | length 3125.2
  Top Layer w8: v1(-1127.3,-1176.22) -1114.17,-1189.35 v1(-1114.17,-1232.28) ; v1(829.53,-910.63) 837.17,-902.98 1034.81,-902.98 1042.32,-895.47 U2.10
  Bottom Layer w8: P3.5 -1266.08,-1860.04 -1114.17,-1708.13 v1(-1114.17,-1232.28) ; v1(-1127.3,-1176.22) -1097.6,-1146.52 593.64,-1146.52 v1(829.53,-910.63)
POT_2: P4.2 U2.11 | length 2360.5
  Top Layer w8: v1(1023.62,-875.98) U2.11@1120.47,-875.98
  Bottom Layer w8: P4.2 -486.02,-1403.74 -442.91,-1446.85 -442.91,-1475.85 -443.44,-1476.38 -295.81,-1624.02 255.91,-1624.02 314.96,-1564.96 314.96,-1407.48 431.02,-1291.43 844.4,-1291.43 1102.36,-1033.46 1102.36,-954.72 v1(1023.62,-875.98)
POT_3: P4.5 U2.12 | length 2344
  Top Layer w8: v1(1023.62,-826.77) 1049.8,-826.77 1079.13,-856.1 U2.12
  Bottom Layer w8: P4.5 261.17,-1639.96 334.65,-1566.49 334.65,-1409.01 437.23,-1306.43 850.61,-1306.43 1117.36,-1039.68 1117.36,-920.51 v1(1023.62,-826.77)
POWER_LED: D3.1 U2.36 | length 4742.9
  Top Layer w8: D3.1 -2095.75,-2618.7 v1(-2066.93,-2589.88) ; v1(462.6,-1387.8) 462.6,-1008.95 632.35,-839.2 676.75,-839.2 U2.36
  Bottom Layer w8: v1(-2066.93,-2589.88) -1994.21,-2589.88 -1915,-2510.68 -1135.53,-2510.68 -1033.46,-2612.74 -1033.46,-2618.11 -563.18,-2618.11 -486.44,-2541.36 -234.23,-2541.36 -167.32,-2608.27 531.5,-2608.27 531.5,-1653.54 452.76,-1574.8 452.76,-1397.64 v1(462.6,-1387.8) v1@452.76,-1387.8
RF_N: F1.3 L4.1 U4.13 | length 158.8
  Top Layer w8: -905.51,-590.55 -893.09,-602.97 L4.1 -875.38,-677.84 U4.13
RF_P: F1.4 L4.2 U4.12 | length 162.5
  Top Layer w8: U4.12 -855.69,-677.84 L4.2 -837.98,-601.75 -834.04,-597.82 F1.4
RST_TGTMCU: C21.2 P2.10 R43.1 U2.34 | length 3370.7
  Top Layer w8: R43.1@512.6,-752.16 512.6,-826.97 530.32,-844.68 572.64,-802.36 605.11,-802.36 v1(610.24,-797.24) 679.33,-797.24 U2.34 ; v1(1171.26,-698.82) 1458.22,-698.82 1988.19,-1228.79 v1(1988.19,-2401.57)
  Bottom Layer w8: v1(610.24,-797.24) 620.7,-807.71 974.41,-807.71 1004.56,-777.56 1082.68,-777.56 1161.42,-698.82 v1(1171.26,-698.82) ; v1(1988.19,-2401.57) 2090.55,-2401.57 P2.10@2217.72,-2528.74
SCLK: U2.58 U4.1 | length 2767.2
  Top Layer w8: U4.1 -942.83,-926.39 -942.83,-1066.92 -901.81,-1107.93 -606.64,-1107.93 -532.97,-1034.27 -494.8,-1034.27 -424.63,-964.09 -263.16,-964.09 -133.11,-1094.15 -133.11,-1295.58 72.53,-1501.22 830.27,-1501.22 929.53,-1401.96 U2.58
SMA_IN: C16.2 P1.1 R14.1 | length 318.9
  Top Layer w39.37: -905.51,-318.9 C16.2 P1.1
STATUS_LED: R8.1 U2.37 | length 4810.9
  Top Layer w8: v1(-2014.76,-2635.83) -2007.87,-2628.94 R8.1 ; v1(492.13,-1348.43) 492.12,-1000.64 636.66,-856.1 U2.37
  Bottom Layer w8: v1(-2014.76,-2635.83) -1929.92,-2635.83 -1819.77,-2525.68 -1141.74,-2525.68 -1048.46,-2618.96 -1048.46,-2624.32 -1039.68,-2633.11 -556.97,-2633.11 -480.22,-2556.36 -240.44,-2556.36 -173.54,-2623.27 537.71,-2623.27 546.5,-2614.48 546.5,-1639.02 492.12,-1584.64 v1(492.13,-1348.43)
SWD_DIO_TGTMCU: P2.2 U2.25 | length 2745.9
  Top Layer w8: U2.25 890.16,-745.87 901.16,-756.87 1054.64,-756.87 1139.69,-671.82 1452.43,-671.82 2003.19,-1222.57 2003.19,-2378.39 2021.72,-2396.92 2021.72,-2505.06 P2.2
TX_LED: R10.1 U2.39 | length 4368
  Top Layer w8: R10.1 -1771.65,-2517.32 v1(-1710.24,-2578.74) ; v1(551.18,-1348.43) 551.18,-1328.74 551.18,-984.01 U2.39@639.72,-895.47
  Bottom Layer w8: v1(-1710.24,-2578.74) -1199.6,-2578.74 -1176.54,-2555.68 -1154.17,-2555.68 -1078.46,-2631.38 -1078.46,-2636.75 -1052.1,-2663.11 -544.54,-2663.11 -467.8,-2586.36 -252.87,-2586.36 -185.96,-2653.27 550.14,-2653.27 576.5,-2626.91 576.5,-1578.9 551.18,-1553.59 v1(551.18,-1348.43)
U_N: D2.1 R17.1 USB_1.2 | length 339.6
  Top Layer w8: R17.1 -945.08,-2150.26 -943.11,-2152.23 D2.1 -943.11,-2370.73 -916.83,-2397.02 USB_1.2
U_P: D2.2 R4.1 USB_1.3 | length 336.1
  Top Layer w8: USB_1.3 -885.83,-2388.65 -886.02,-2388.45 -868.31,-2370.73 D2.2 -868.31,-2152.23 -866.34,-2150.26 R4.1
USB_MCU_N: R17.2 U2.6 | length 2919.7
  Top Layer w8: R17.2 -933.07,-2063.39 v1(-933.07,-1980.31) ; v1(994.09,-994.09) 1014.25,-973.94 1055.73,-973.94 1056.01,-974.21 U2.6
  Bottom Layer w8: v1(-933.07,-1980.31) -926.71,-1980.31 -914.71,-1968.31 -914.71,-1967.89 -909.45,-1962.63 -909.45,-1415.49 -712.18,-1218.22 803.57,-1218.22 948.89,-1072.9 963.68,-1072.9 994.09,-1042.48 v1(994.09,-994.09)
USB_MCU_P: R4.2 U2.5 | length 2862.6
  Top Layer w8: v1(-884.71,-1980.31) -884.71,-2057.02 R4.2 ; v1(1043.31,-1003.94) 1053.34,-993.9 U2.5
  Bottom Layer w8: v1(-884.71,-1980.31) -893.19,-1971.83 -891.45,-1970.08 -891.45,-1422.94 -704.72,-1236.22 811.02,-1236.22 956.35,-1090.9 971.13,-1090.9 1043.31,-1018.72 v1(1043.31,-1003.94)
VREG: C4.1 C6.1 D1.3 Q4.2 V1.3 | length 713
  Top Layer w20: V1.3@-2185.04,-1220.47 -2185.04,-1225.39 -2172.25,-1238.19 C6.1 -2024.61,-1238.19 -2004.92,-1218.5 C4.1 ; C4.1@-1968.5,-1220.47 -1968.5,-1250.98 -1937.99,-1220.47 -1879.92,-1220.47 D1.3 -1879.92,-1074.02 -1850.95,-1045.05 -1850.95,-993.12 -1851.11,-992.96 ; Q4.2 -1917.32,-948.82 -1883.14,-983 -1861.07,-983 -1851.11,-992.96 ; -1850.95,-1013.22 -1850.39,-1013.78 ; -1850.95,-1007.52 -1851.11,-1007.36 -1851.11,-992.96
pads on no net: D1.2 P2.6 P2.7 P2.8 P2.9 P3.7 P3.8 P3.9 P3.10 P3.11 P3.12 P4.7 P4.8 P4.9 P4.10 P4.11 P4.12 P5.0 P5.1 P6.0 P6.1 SW1.4 SW6.4 U2.2 U2.17 U2.18 U2.19 U2.20 U2.21 U2.23 U2.24 U2.26 U2.27 U2.28 U2.29 U2.35 U2.40 U2.41 U2.42 U2.43 U2.44 U2.45 U2.46 U2.49 U2.56 U2.63 U2.64 U3. USB_1. USB_1.4

## Polygon pours and split planes (outlines as drawn)
GND on Top Layer "Top Layer-No Net 1" (solid, remove dead copper, pour order 0): -4340.55,492.13 -4301.18,452.76 -4301.18,-3061.02 2500,-3061.02 2598.43,-2962.6 2647.64,-2913.39 2647.64,561.02
GND on Bottom Layer "Top Layer-No Net 1" (solid, remove dead copper, pour order 2): -4370.08,561.02 -4370.08,-3070.87 -4340.55,-3100.39 -4301.18,-3061.02 2716.54,-3061.02 2716.54,226.38 2431.1,511.81

## Keep-outs
Keep-Out Layer:
  lines w10: -4094.49,-2755.91 -4094.49,157.48 2283.46,157.48 2283.46,-2716.54 2283.46,-2755.91 -4094.49,-2755.91

## Silkscreen, mask and mechanical layers (free items; w line width, h text height)
Top Overlay:
  text "2.4GHz FSK" at -1397.64,98.43 h60
  text "0dBm 50Ω" at -1397.64,0 h60
  text "RF Remote" at -3602.36,-374.02 h80
  text "Kellen Carey" at -3602.36,-433.07 h60
  text "Nathan Zimmerman" at -3602.36,-492.13 h60
  text "Cris Ababei" at -3602.36,-551.18 h60
  text "10/4/15" at -3602.36,-610.24 h60
  text "Rev 1" at -3602.36,-669.29 h60
  text "Marq Drone" at -78.74,-2480.31 h100
  text "B1" at -3228.35,-2559.06 h80
  text "B2" at -2529.53,-2559.06 h80
  text "B3" at -1643.7,-2559.06 h80
  text "B4" at -600.39,-2559.06 h80
  text "B5" at 787.4,-2559.06 h80
  text "B6" at 1505.91,-2559.06 h80
  text "Power" at -3553.15,-2578.74 h80
  text "Status" at -1948.82,-2687.01 h50
  text "Prog" at 1988.19,-2687.01 h80
  text "PWR" at -2185.04,-2716.54 h50
Bottom Overlay:
  text "2.4GHz FSK" at -1082.68,98.43 h60
  text "0dBm 50Ω" at -1082.68,0 h60
  text "RF Remote" at -3169.29,-334.65 h80
  text "Kellen Carey" at -3169.29,-393.7 h60
  text "Nathan Zimmerman" at -3169.29,-452.76 h60
  text "Cris Ababei" at -3169.29,-511.81 h60
  text "10/4/15" at -3169.29,-570.87 h60
  text "Rev 1" at -3169.29,-629.92 h60

## Dimensions
-4094.49,-2755.91 to -4094.49,157.48 on Mechanical 1
-4094.49,-2755.91 to 2283.46,-2716.54 on Mechanical 1

## Text inside footprints (layer, text, board x,y; h text height)
P2: Top Overlay "1" at 1935.04,-2598.74 h39.37
P3: Top Overlay "Key" at -1181.1,-1771.65 h40 r90; Top Overlay "1" at -1206.1,-2234.06 h40 r90
P4: Top Overlay "Key" at -620.08,-1732.28 h40 r270; Top Overlay "1" at -593.9,-1265.94 h40 r270